# EAGLE board Analog Board (EAGLE 9.5.0)
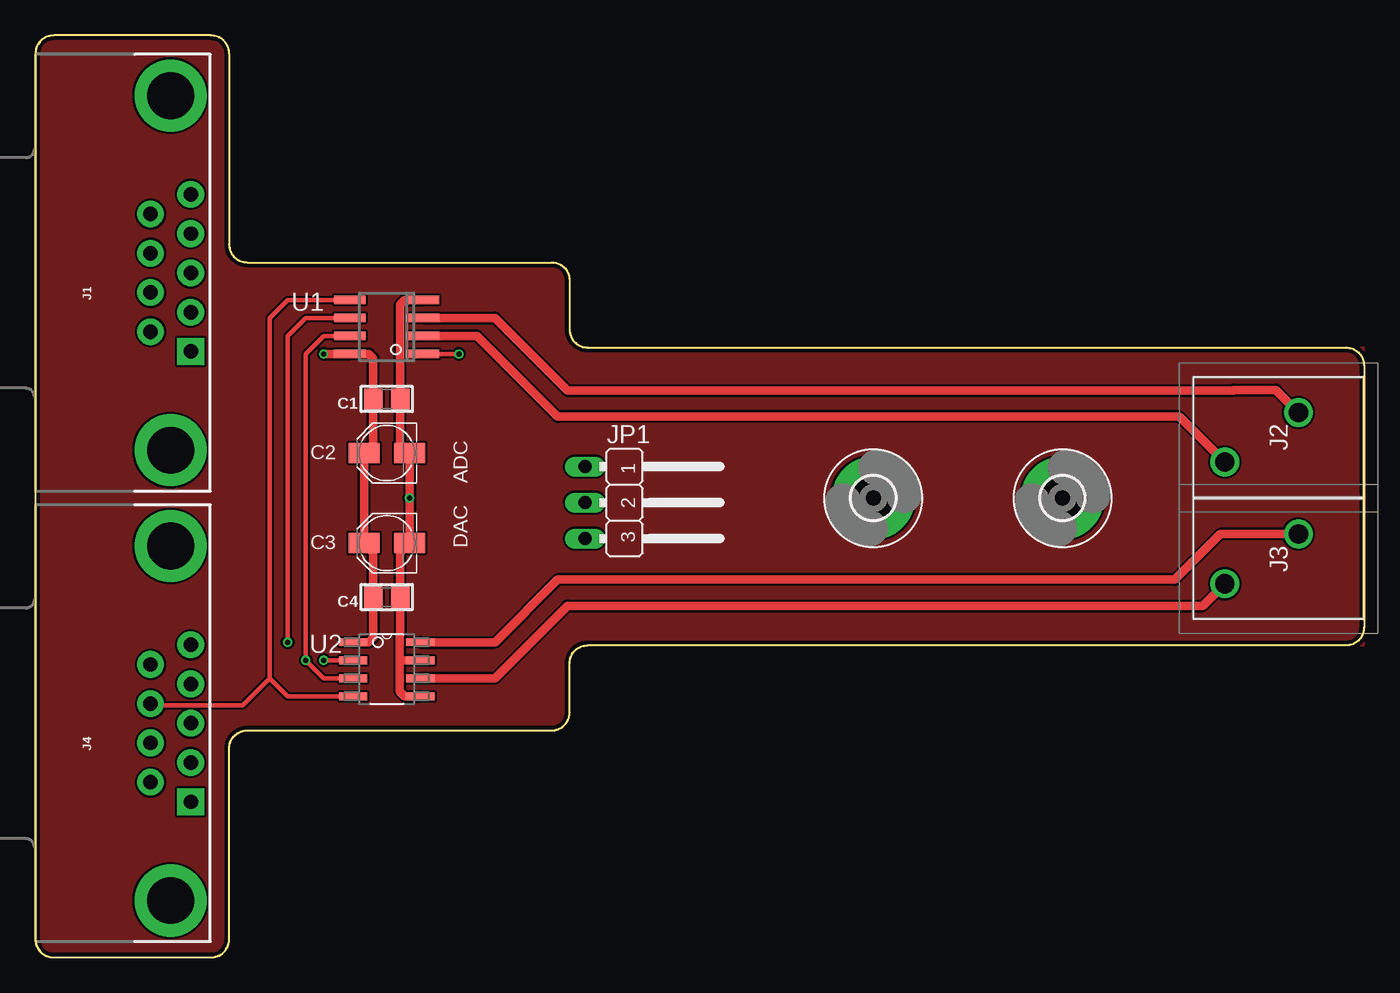
[diagram p0: board, top side]
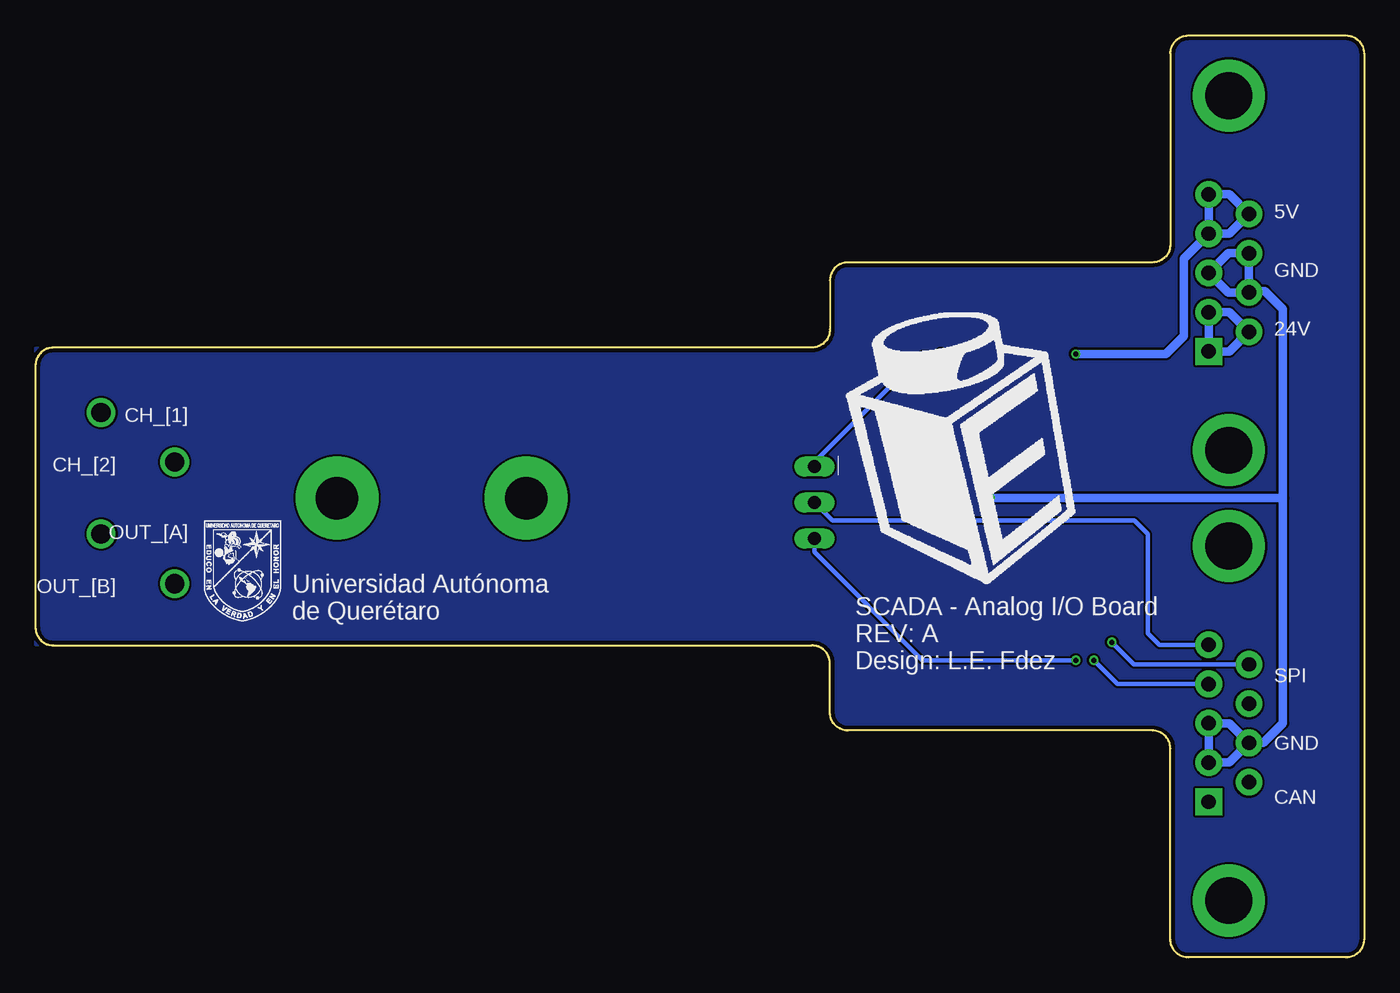
[diagram p1: board, bottom side, seen from below]

Size 93.65 x 65 mm. Coordinates in mm from the lower left corner, seen from the top.
Outline: 12.38,65 1.27,65 arc90 0,63.73 0,1.27 arc90 1.27,0 12.38,0 arc90 13.65,1.27 13.65,14.73 arc-90 14.92,16 36.38,16 arc90 37.65,17.27 37.65,20.73 arc-90 38.92,22 92.38,22 arc90 93.65,23.27 93.65,41.73 arc90 92.38,43 38.92,43 arc-90 37.65,44.27 37.65,47.73 arc90 36.38,49 14.92,49 arc-90 13.65,50.27 13.65,63.73 arc90 12.38,65
Copper layers (1*16): Top 0.035mm / dielectric 1.5mm / Bottom 0.035mm
Design rules "SeeedStudio_2layer_DRU_no_angle_20140221": minimum track width 6mil, minimum drill 12mil, track to track 6mil, track to pad 6mil, pad to pad 6mil, via to via 6mil, smd to smd 0mil, copper to edge 10mil, drill to drill 10mil, minimum pad ring 10mil, minimum via ring 6mil, stop-mask expansion 2mil, vias tented up to drill 100mil, thermal gap 10mil

## Footprints (pad centres in the part's own frame; a part is rotated, then mirrored left to right if it is on the bottom)
0805_NOTHERMALS = smd 1.3 x 1.5: 1 -0.95,0; 2 0.95,0
PANASONIC_B = smd 2.2 x 1.4: + 1.6,0; - -1.6,0
3,0-PAD = drill 3 pad 5.842: B3,0 0,0
DB9 = drill 1.016 pad 1.88 square: 1 -5.54,-1.42 | drill 1.016 pad 1.88: 2 -2.77,-1.42; 3 0,-1.42; 4 2.77,-1.42; 5 5.54,-1.42; 6 -4.15,1.42; 7 -1.38,1.42; 8 1.38,1.42; 9 4.15,1.42 | drill 3.302 pad 5.08: G1 -12.5,0; G2 12.5,0
128340112 = drill 1.35 pad 2.025: 1 -1.75,3.8; 2 1.75,-1.4
JP2W = drill 0.914 long: 1 -2.54,-1.27; 2 0,-1.27; 3 2.54,-1.27
SO-08 = smd 0.6 x 2.2: 1 -1.905,-2.6; 2 -0.635,-2.6; 3 0.635,-2.6; 4 1.905,-2.6; 5 1.905,2.6; 6 0.635,2.6; 7 -0.635,2.6; 8 -1.905,2.6
SOIC8-N_MC = smd 1.981 x 0.559: 1 -2.362,1.905; 2 -2.362,0.635; 3 -2.362,-0.635; 4 -2.362,-1.905; 5 2.362,-1.905; 6 2.362,-0.635; 7 2.362,0.635; 8 2.362,1.905

## Placement (x,y rotation side)
C1  0.1uF  [0805_NOTHERMALS]  24.77,39.37 180 top
C2  1uF  [PANASONIC_B]  24.77,35.56 180 top
C3  1uF  [PANASONIC_B]  24.77,29.21 180 top
C4  0.1uF  [0805_NOTHERMALS]  24.77,25.4 180 top
H1  MOUNT-PAD-ROUND3.0  [3,0-PAD]  59.05,32.38 0 top
H2  MOUNT-PAD-ROUND3.0  [3,0-PAD]  72.39,32.38 0 top
J1  [DB9]  9.53,48.26 90 top
J2  1-2834011-2  [128340112]  87.63,36.67 90 top
J3  1-2834011-2  [128340112]  87.63,28.1 90 top
J4  [DB9]  9.53,16.51 90 top
JP1  [JP2W]  40,32.07 270 top
U1  MCP3202SN  [SO-08]  24.77,44.45 90 top
U2  MCP4822-E/SN  [SOIC8-N_MC]  24.77,20.32 0 top

## Library data of the parts
C1 C4 = microbuilder
C2 C3 = adafruit
H1 H2 = holes
J1 J4 = SparkFun-Connectors; PROD_ID: CONN-08194
J2 J3 = 1-2834011-2; ARROW_PART_NUMBER: 1-2834011-2; ARROW_PRICE/STOCK: https://www.arrow.com/en/products/1-2834011-2/te-connectivity; DESCRIPTION: 2P 3.5mm Top Entry Screwless Connector. TE Connectivity 3.5mm Pitch Vertical PCB Terminal Block with Solder Termination, Through Hole, 2 Way; HEIGHT: 11mm; MANUFACTURER_NAME: TE Connectivity; MANUFACTURER_PART_NUMBER: 1-2834011-2; RS_PART_NUMBER: 1649131; RS_PRICE/STOCK: http://uk.rs-online.com/web/p/products/1649131
JP1 = jumper
U1 = microchip; MF: MICROCHIP; MPN: MCP3202-CI/SN; OC_FARNELL: 1196803; OC_NEWARK: 19C7207
U2 = MCP4822-E_SN; AVAILABILITY: Unavailable; DESCRIPTION: MCP4822 Series 2 Ch 12-Bit Voltage Output Digital-to-Analog Converter-SOIC-8; MF: Microchip; MP: MCP4822-E/SN; PACKAGE: SOIC-8 Microchip; PRICE: None

## Nets
+24V: J1.1 J1.2 J1.6
AGND: C1.1 C2.- C3.- C4.1 J1.3 J1.7 J1.8 J4.2 J4.3 J4.7 U1.4 U2.5 U2.7
CAN_H: J4.1
CAN_L: J4.6
CS: J4.5 JP1.2
MISO: J4.9 U1.6
MOSI: J4.8 U1.5 U2.4
N$1: JP1.3 U2.2
N$2: JP1.1 U1.1
N$3: J3.2 U2.8
N$4: J3.1 U2.6
N$5: J2.1 U1.2
N$7: J2.2 U1.3
SCK: J4.4 U1.7 U2.3
VCCA: C1.2 C2.+ C3.+ C4.2 J1.4 J1.5 J1.9 U1.8 U2.1

## Tracks (layer width: path | path; a pad name or v marks a point on that pad's centre or on a via)
+24V
  Bottom 0.61: J1.1 J1.2 9.49,45.49 J1.6 9.5,42.72 J1.1
AGND  (via drill 0.35)
  Top 0.61: 25.68,20.95 25.68,22.69 25.71,22.73 C4.1 25.71,28.56 C3.- v26.37,32.38 C2.- 25.71,36.21 C1.1 25.71,46.03 26.03,46.35 U1.4 | 25.68,20.95 25.68,18.77 26.03,18.41 U2.5 | U2.7 25.68,20.95
  Bottom 0.61: J1.7 J1.8 9.56,49.64 J1.3 9.56,46.88 J1.7 | J4.7 9.49,16.51 J4.3 J4.2 9.5,13.74 J4.7 | J4.7 7.1,15.13 5.71,16.51 5.71,32.38 | J1.7 8,46.99 6.99,46.99 5.71,45.72 5.71,32.38 | 5.71,32.38 v26.37,32.38
COPPER
  pour Top: 0,63.73 0,1.27 arc90 1.27,0 12.38,0 arc90 13.65,1.27 13.65,14.73 arc-90 14.92,16 36.38,16 arc90 37.65,17.27 37.65,20.73 arc-90 38.92,22 93.65,22 93.65,43 38.92,43 arc-90 37.65,44.27 37.65,47.73 arc90 36.38,49 14.92,49 arc-90 13.65,50.27 13.65,63.73 arc90 12.38,65 1.27,65 arc90
  pour Bottom: 0,63.73 0,1.27 arc90 1.27,0 12.38,0 arc90 13.65,1.27 13.65,14.73 arc-90 14.92,16 36.38,16 arc90 37.65,17.27 37.65,20.73 arc-90 38.92,22 93.65,22 93.65,43 38.92,43 arc-90 37.65,44.27 37.65,47.73 arc90 36.38,49 14.92,49 arc-90 13.65,50.27 13.65,63.73 arc90 12.38,65 1.27,65 arc90
CS
  Bottom 0.305: JP1.2 37.46,30.8 16.19,30.8 15.24,29.84 15.24,22.86 14.43,22.05 J4.5
MISO  (via drill 0.35)
  Top 0.305: U1.6 19.05,45.09 17.78,43.81 v17.78,22.23
  Bottom 0.305: J4.9 16.22,20.66 v17.78,22.23
MOSI
  Top 0.305: U2.4 17.78,18.41 16.51,19.68 | U1.5 17.78,46.35 16.51,45.09 16.51,19.68 | 16.51,19.68 14.6,17.78 8.21,17.78 J4.8
N$1  (via drill 0.35)
  Top 0.305: v20.32,20.95 U2.2
  Bottom 0.305: JP1.3 38.73,28.57 31.12,20.95 v20.32,20.95
N$2  (via drill 0.35)
  Top 0.305: v29.84,42.55 U1.1
  Bottom 0.305: JP1.1 38.73,34.92 31.12,42.55 v29.84,42.55
N$3
  Top 0.61: U2.8 32.38,22.23 36.8,26.64 80.33,26.64 83.53,29.85 J3.2
N$4
  Top 0.61: U2.6 32.38,19.68 37.49,24.79 82.27,24.79 J3.1
N$5
  Top 0.61: U1.2 31.12,43.81 36.8,38.12 80.63,38.12 J2.1
N$7
  Top 0.61: U1.3 32.38,45.09 37.49,39.98 84.43,39.98 84.46,40.01 87.45,40.01 J2.2
SCK  (via drill 0.35)
  Top 0.305: U1.7 20.32,43.81 19.05,42.55 v19.05,20.95 20.32,19.68 U2.3
  Bottom 0.305: J4.4 17.38,19.28 v19.05,20.95
VCCA  (via drill 0.35)
  Top 0.61: U2.1 23.49,22.23 23.81,22.55 C4.2 23.81,28.56 C3.+ C2.+ 23.81,36.21 C1.2 23.81,42.23 23.49,42.55 U1.8 v20.32,42.55
  Bottom 0.61: J1.4 9.49,51.03 J1.9 9.5,53.8 J1.5 J1.4 | J1.4 12.7,49.27 12.7,43.81 13.97,42.55 v20.32,42.55

## Text on the board
tPlace: DAC ADC
bPlace: 5V | GND | 24V | CH_[1] | CH_[2] | OUT_[A] | OUT_[B] | SCADA - Analog I/O Board | Universidad Autónoma / de Querétaro | REV: A | Design: L.E. Fdez | SPI | GND | CAN